# Altium PCB CRE401.PcbDoc
Units mm, origin at the board's own origin, x right, y up, seen from the top; angles counter-clockwise.
Board outline 26 x 7 mm, 2 copper layers (L1, L2), stack 1.595 mm thick; 13 components, 10 nets, 34 pads, 4 vias.
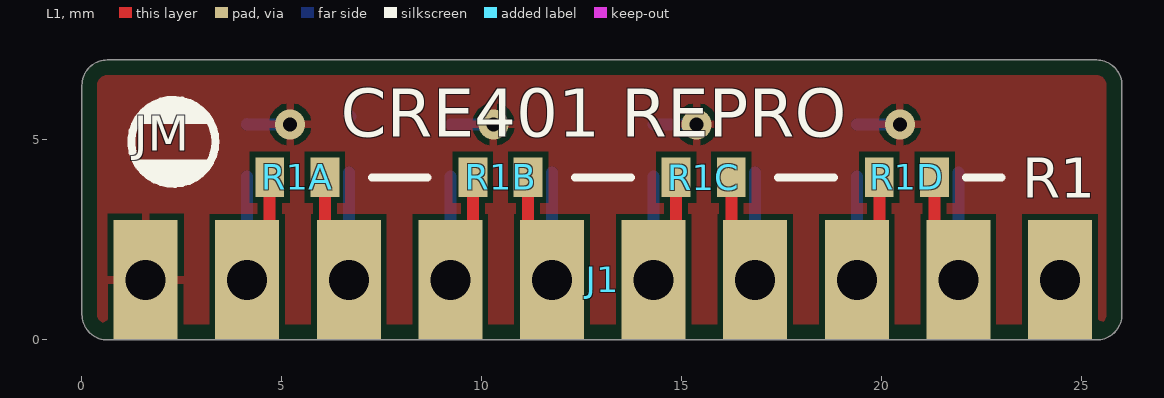
[diagram p0: L1 view]
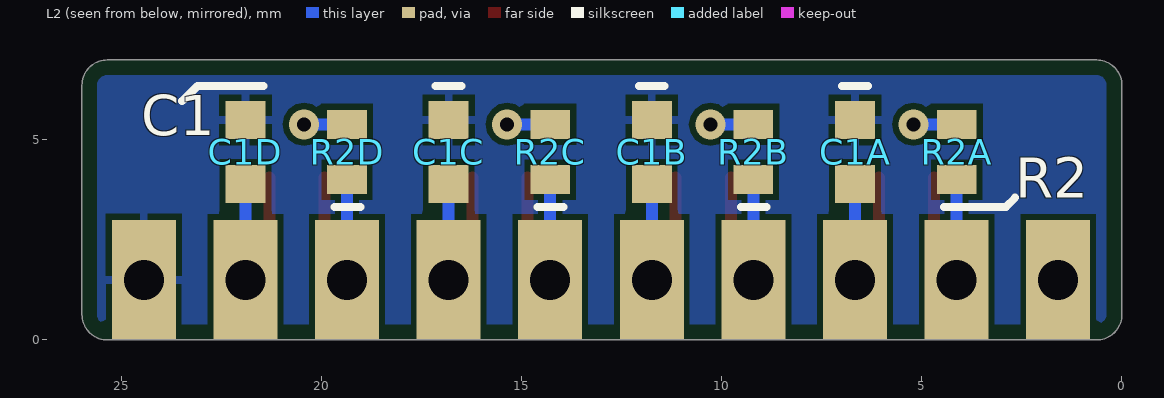
[diagram p1: L2 view, seen from below]
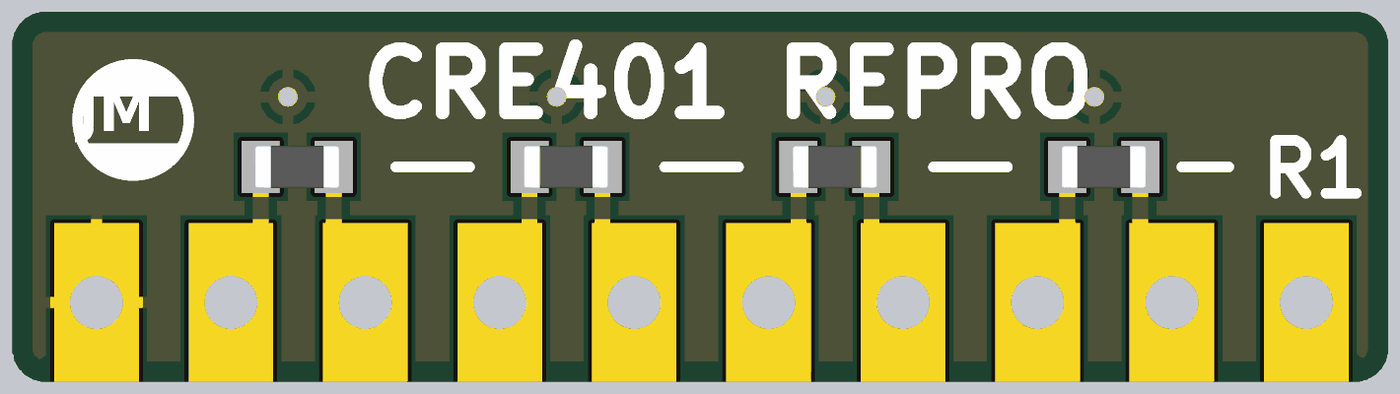
[diagram p2: 3D render of the assembled board from above, using the file's embedded part models]
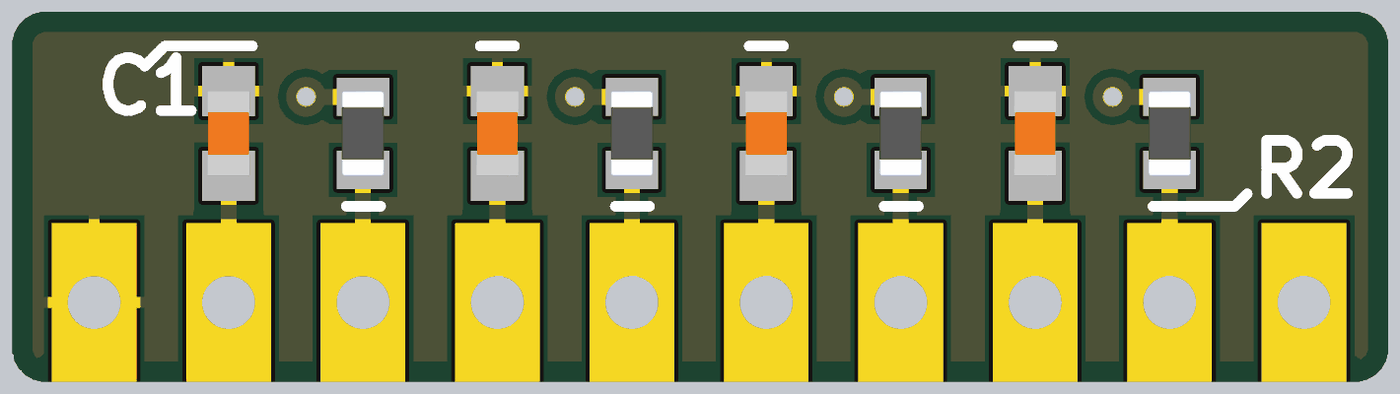
[diagram p3: 3D render of the assembled board from below, using the file's embedded part models]

## Layer stack, top to bottom
Top Solder: solder mask 0.0025, Solder Resist, Dk 0
L1: signal copper 0.0356
Core: dielectric 1.524, FR-4, Dk 4.6
L2: signal copper 0.0356
Bottom Solder: solder mask 0.0025, Solder Resist, Dk 0

## Board outline
0,0.635 0,6.365 cw(c0.635,6.365) 0.635,7 25.365,7 cw(c25.365,6.365) 26,6.365 26,0.635 cw(c25.365,0.635) 25.365,0 0.635,0 cw(c0.635,0.635)

## Design rules (kind name [scope] priority, off if disabled: settings)
BoardOutlineClearance [All] p1: gap=0.381 ignorepadtopadclearanceinfootprint=FALSE
Clearance [All] p1: gap=0.152 ignorepadtopadclearanceinfootprint=FALSE except(0: Arc-Hole Track-Hole SMDPad-Hole THPad-Hole Via-Hole Fill-Hole Poly-Hole Region-Hole Text-Hole)
ComponentClearance [All] p1: gap=0.025 collisioncheckmode=3 verticalgap=0.025 showdistances=FALSE
DiffPairsRouting [All] p1: maxlimit=10 minlimit=0.152 mostfreqgap=0.203 toplayer_minwidth=0.152 toplayer_maxwidth=0.381 toplayer_prefwidth=0.203 bottomlayer_minwidth=0.152 bottomlayer_maxwidth=0.381 bottomlayer_prefwidth=0.203 maxuncoupledlength=12.7
HoleSize [All] p1: absolutevalues=TRUE maxlimit=6.731 minlimit=0.33 maxpercent=80.000 minpercent=20.000
HoleToHoleClearance [All] p1: gap=0.254 allowstackedmicrovias=FALSE
MinimumAnnularRing [All] p1: minimumring=0.178
MinimumSolderMaskSliver [All] p1: minsoldermaskwidth=0
PlaneClearance [All] p1: clearance=0.254
PlaneConnect [All] p1: planeconnectstyle=Direct reliefexpansion=0.406 reliefentries=4 reliefconductorwidth=0.152 reliefairgap=0.152
PolygonConnect [All] p1: connectstyle=Relief reliefconductorwidth=0.203 reliefentries=4 polygonreliefangle="90 Angle" airgapwidth=0.152
RoutingCorners [All] p1: cornerstyle=45-Degree minsetback=1.25 maxsetback=1.25
RoutingVias [All] p1: holewidth=0.381 width=0.762 viastyle="Through Hole" minholewidth=0.33 minwidth=0.686 maxholewidth=2.54 maxwidth=2.896
SilkToSilkClearance [All] p1: silktosilkclearance=0
SilkToSolderMaskClearance [IsPad] p1: minsilkscreentomaskgap=0.152 clearancetoexposedcopper=TRUE
SolderMaskExpansion [All] p1: expansion=0.075
Width [All] p1: maxlimit=10.16 minlimit=0.152 preferedwidth=0.203
20 further rules are at their usual default settings.

## Components (designator, comment, footprint, x,y, rotation, side; value= is the part's Value field where it differs from the comment)
C1A "Cap0603" CAPC1608N 6.672,4.699 r90 bottom value=33nF
C1B "Cap0603" CAPC1608N 11.752,4.699 r90 bottom value=33nF
C1C "Cap0603" CAPC1608N 16.832,4.699 r90 bottom value=33nF
C1D "Cap0603" CAPC1608N 21.912,4.699 r90 bottom value=33nF
J1 "CRE401 HEADER" HEADER10_SMD_THT 1.592,1.5 r0 top
R1A "Res0603" RESC1608N 5.385,4.064 r180 top value=330R
R1B "Res0603" RESC1608N 10.465,4.064 r180 top value=330R
R1C "Res0603" RESC1608N 15.545,4.064 r180 top value=330R
R1D "Res0603" RESC1608N 20.625,4.064 r180 top value=330R
R2A "Res0603" RESC1608N 4.132,4.699 r90 bottom value=1K
R2B "Res0603" RESC1608N 9.212,4.699 r90 bottom value=1K
R2C "Res0603" RESC1608N 14.292,4.699 r90 bottom value=1K
R2D "Res0603" RESC1608N 19.372,4.699 r90 bottom value=1K

## Footprints (in the part's own frame and the unit in brackets; to place one, negate y for a bottom-side part, rotate by r counter-clockwise, add the part's x,y. Pads: shape width x height; smd on the part's side, far side on the other; paste and mask are expansions set on the pad)
CAPC1608N [mm] "Chip Capacitor, Body 1.6x0.8mm, IPC Medium Density"
  rect 0.95x1 smd: 1(-0.8,0) 2(0.8,0)
  body extent -0.8,-0.4 0.8,0.4, height 0.5
HEADER10_SMD_THT [mm]
  rect 1.6x3 hole 1: 1(0,0) 2(2.54,0) 3(5.08,0) 4(7.62,0) 5(10.16,0) 6(12.7,0) 7(15.24,0) 8(17.78,0) 9(20.32,0) 10(22.86,0)
RESC1608N [mm] "Chip Resistor, Body 1.6x0.8mm, IPC Medium Density"
  rect 0.72x0.99 smd: 1(-0.69,0) 2(0.69,0)
  body extent -0.8,-0.4 0.8,0.4, height 0.5

## Part data
C1A C1B C1C C1D: "Capacitor (SMD), 0603", PackageReference=CAPC1608N
J1: "10p 0.1\" header, male, right angle or vertical"
R1A R1B R1C R1D R2A R2B R2C R2D: "Resistor (SMD), 0603", PackageReference=RESC1608N

## Via types
v1: diameter 0.75, hole 0.35, L1 to L2, tented both sides, 4 vias

## Nets (pads, with @x,y where several pads share a name; then routed paths per layer and width w, separated by ;. In a path a pad name is that pad's centre, name@x,y a point inside that pad or via, vN(x,y) a via of type N, cw(c..) or ccw(c..) an arc to the next point about the centre after c; other vN are vias at no path point)
GND: C1A.2 C1B.2 C1C.2 C1D.2 J1.10 | length 0.1
  L2 w0.3: C1A.2@6.672,5.626 C1A.2@6.71,5.588
NetC1A_1: C1A.1 J1.3 R1A.1 | length 5.5
  L1 w0.3: R1A.1 6.075,2.097 J1.3
  L2 w0.3: J1.3@6.672,1.541 C1A.1 C1A.1@6.672,4.18
NetC1B_1: C1B.1 J1.5 R1B.1 | length 5.5
  L1 w0.3: R1B.1 11.155,2.097 J1.5
  L2 w0.3: J1.5@11.752,1.541 C1B.1@11.752,4.18
NetC1C_1: C1C.1 J1.7 R1C.1 | length 5.5
  L1 w0.3: R1C.1 16.235,2.097 J1.7
  L2 w0.3: J1.7@16.832,1.541 C1C.1@16.832,4.18
NetC1D_1: C1D.1 J1.9 R1D.1 | length 5.5
  L1 w0.3: R1D.1 21.315,2.097 J1.9
  L2 w0.3: J1.9@21.912,1.541 C1D.1@21.912,4.18
NetJ1_2: J1.2 R1A.2 R2A.1 | length 5.2
  L1 w0.3: J1.2 4.695,2.063 R1A.2
  L2 w0.3: J1.2@4.132,1.651 R2A.1 R2A.1@4.132,4.08
NetJ1_4: J1.4 R1B.2 R2B.1 | length 5.2
  L1 w0.3: J1.4 9.775,2.063 R1B.2
  L2 w0.3: J1.4@9.212,1.651 R2B.1@9.212,4.08
NetJ1_6: J1.6 R1C.2 R2C.1 | length 5.2
  L1 w0.3: J1.6 14.855,2.063 R1C.2
  L2 w0.3: J1.6@14.292,1.651 R2C.1@14.292,4.08
NetJ1_8: J1.8 R1D.2 R2D.1 | length 5.2
  L1 w0.3: J1.8 19.935,2.063 R1D.2
  L2 w0.3: J1.8@19.372,1.651 R2D.1@19.372,4.08
VCC: J1.1 R2A.2 R2B.2 R2C.2 R2D.2 | length 4.3
  L2 w0.3: R2A.2@4.124,5.397 R2A.2 v1(5.208,5.389) ; R2B.2 v1(10.288,5.389) ; R2C.2 v1(15.368,5.389) ; R2D.2 v1(20.448,5.389)

## Polygon pours and split planes (outlines as drawn)
VCC on L1 "Top Layer-VCC" (solid, pour order 1): 0,0.635 0,6.365 cw(c0.635,6.365) 0.635,7 25.365,7 cw(c25.365,6.365) 26,6.365 26,0.635 cw(c25.365,0.635) 25.365,0 0.635,0 cw(c0.635,0.635)
GND on L2 "Bottom Layer-GND" (solid, pour order 2): 0,0.635 0,6.365 cw(c0.635,6.365) 0.635,7 25.365,7 cw(c25.365,6.365) 26,6.365 26,0.635 cw(c25.365,0.635) 25.365,0 0.635,0 cw(c0.635,0.635)

## Silkscreen, mask and mechanical layers (free items; w line width, h text height)
Top Overlay:
  circle w0.2: c2.286,4.953 r1.05
  lines w0.2: 1.456,4.407 3.107,4.407 ; 1.465,5.499 3.116,5.499 ; 1.583,4.28 2.98,4.28 ; 1.592,5.626 2.989,5.626 ; 1.71,4.153 2.853,4.153 ; 1.719,5.753 2.862,5.753 ; 1.837,4.026 2.726,4.026 ; 1.846,5.88 2.735,5.88 ; 7.246,4.064 8.643,4.064 ; 12.326,4.064 13.723,4.064 ; 17.406,4.064 18.803,4.064 ; 22.098,4.064 22.987,4.064
  text "CRE401 REPRO" at 6.477,5.08 h1.2
  text "JM" at 1.294,4.442 h1.5
  text "R1" at 23.502,3.556 h1
Bottom Overlay:
  lines w0.2: 2.667,3.556 2.903,3.32 4.445,3.32 ; 6.35,6.35 6.995,6.35 ; 8.88,3.32 9.525,3.32 ; 11.43,6.35 12.075,6.35 ; 13.96,3.32 14.605,3.32 ; 16.51,6.35 17.155,6.35 ; 19.04,3.32 19.685,3.32 ; 21.463,6.35 23.114,6.35 23.495,5.969
  text "C1" at 24.511,5.12 h1
  text "R2" at 2.667,3.556 h1
Outline:
  lines w0.1: 0,6.35 0,0.635 ccw(c0.635,0.635) 0.635,0 25.365,0 ccw(c25.365,0.635) 26,0.635 26,6.365 ccw(c25.365,6.365) 25.365,7 0.635,7 ccw(c0.635,6.365) 0,6.365